# EAGLE board CT_schematic (EAGLE 7.6.0)

Size 100 x 80 mm. Coordinates in mm from the lower left corner, seen from the top.
Outline: 0,0 100,0 100,80 0,80 0,0
Copper layers (1*16): Top 0.035mm / dielectric 1.5mm / Bottom 0.035mm
Design rules "default": minimum track width 10mil, minimum drill 24mil, track to track 8mil, track to pad 8mil, pad to pad 8mil, via to via 8mil, smd to smd 8mil, copper to edge 40mil, drill to drill 8mil, minimum pad ring 10mil, minimum via ring 8mil, stop-mask expansion 4mil, vias tented up to drill 0mil, thermal gap 10mil

## Footprints (pad centres in the part's own frame; a part is rotated, then mirrored left to right if it is on the bottom)
C0603 = smd 0.8 x 0.8: 1 -0.762,0; 2 0.762,0
C0402 = smd 0.5 x 0.5: 1 -0.508,0; 2 0.508,0
C0805 = smd 1.2 x 1.3: 1 -1.016,0; 2 1.016,0
C1206 = smd 1.3 x 1.6: 1 -1.524,0; 2 1.524,0
DR1040 = smd 1.6 x 3.2: 1 -4.458,0; 2 4.458,0
R0603 = smd 0.8 x 0.8: 1 -0.762,0; 2 0.762,0
LQFP100 = smd 0.3 x 1.2: 1 -6,-7.75; 2 -5.5,-7.75; 3 -5,-7.75; 4 -4.5,-7.75; 5 -4,-7.75; 6 -3.5,-7.75; 7 -3,-7.75; 8 -2.5,-7.75; 9 -2,-7.75; 10 -1.5,-7.75; 11 -1,-7.75; 12 -0.5,-7.75; 13 0,-7.75; 14 0.5,-7.75; 15 1,-7.75; 16 1.5,-7.75; 17 2,-7.75; 18 2.5,-7.75; 19 3,-7.75; 20 3.5,-7.75; 21 4,-7.75; 22 4.5,-7.75; 23 5,-7.75; 24 5.5,-7.75; 25 6,-7.75; 51 6,7.75; 52 5.5,7.75; 53 5,7.75; 54 4.5,7.75; 55 4,7.75; 56 3.5,7.75; 57 3,7.75; 58 2.5,7.75; 59 2,7.75; 60 1.5,7.75; 61 1,7.75; 62 0.5,7.75; 63 0,7.75; 64 -0.5,7.75; 65 -1,7.75; 66 -1.5,7.75; 67 -2,7.75; 68 -2.5,7.75; 69 -3,7.75; 70 -3.5,7.75; 71 -4,7.75; 72 -4.5,7.75; 73 -5,7.75; 74 -5.5,7.75; 75 -6,7.75 | smd 1.2 x 0.3: 26 7.75,-6; 27 7.75,-5.5; 28 7.75,-5; 29 7.75,-4.5; 30 7.75,-4; 31 7.75,-3.5; 32 7.75,-3; 33 7.75,-2.5; 34 7.75,-2; 35 7.75,-1.5; 36 7.75,-1; 37 7.75,-0.5; 38 7.75,0; 39 7.75,0.5; 40 7.75,1; 41 7.75,1.5; 42 7.75,2; 43 7.75,2.5; 44 7.75,3; 45 7.75,3.5; 46 7.75,4; 47 7.75,4.5; 48 7.75,5; 49 7.75,5.5; 50 7.75,6; 76 -7.75,6; 77 -7.75,5.5; 78 -7.75,5; 79 -7.75,4.5; 80 -7.75,4; 81 -7.75,3.5; 82 -7.75,3; 83 -7.75,2.5; 84 -7.75,2; 85 -7.75,1.5; 86 -7.75,1; 87 -7.75,0.5; 88 -7.75,0; 89 -7.75,-0.5; 90 -7.75,-1; 91 -7.75,-1.5; 92 -7.75,-2; 93 -7.75,-2.5; 94 -7.75,-3; 95 -7.75,-3.5; 96 -7.75,-4; 97 -7.75,-4.5; 98 -7.75,-5; 99 -7.75,-5.5; 100 -7.75,-6
TSSOP20-I = smd 0.4 x 1.35: 1 -2.925,-2.875; 2 -2.275,-2.875; 3 -1.625,-2.875; 4 -0.975,-2.875; 5 -0.325,-2.875; 6 0.325,-2.875; 7 0.975,-2.875; 8 1.625,-2.875; 9 2.275,-2.875; 10 2.925,-2.875; 11 2.925,2.875; 12 2.275,2.875; 13 1.625,2.875; 14 0.975,2.875; 15 0.325,2.875; 16 -0.325,2.875; 17 -0.975,2.875; 18 -1.625,2.875; 19 -2.275,2.875; 20 -2.925,2.875
HTSS-105-01-G-D = drill 1 pad 1.8 square: 1 0,0 | drill 1 pad 1.8: 2 0,2.54; 3 2.54,0; 4 2.54,2.54; 5 5.08,0; 6 5.08,2.54; 7 7.62,0; 8 7.62,2.54; 9 10.16,0; 10 10.16,2.54
FCI_10118193-0001LF = smd 0.4 x 1.35: 1 -1.3,2.675; 2 -0.65,2.675; 3 0,2.675; 4 0.65,2.675; 5 1.3,2.675 | smd 1.6 x 1.4: 6 -3.2,2.45; 7 3.2,2.45 | smd 1.9 x 1.9: 8 -1.2,0; 9 1.2,0 | hole 0.5: -3.3,0; 3.3,0
SOT143B = smd 1 x 0.7: 1 -0.75,-1 | smd 0.6 x 0.7: 2 0.95,-1; 3 0.95,1; 4 -0.95,1
XB24CZ7UIS-004 = smd 2.84 x 1.52: 1 -10,6; 2 -10,4; 3 -10,2; 4 -10,0; 5 -10,-2; 6 -10,-4; 7 -10,-6; 8 -10,-8; 9 -10,-10; 10 -10,-12; 11 -10,-14; 12 -10,-16; 13 -10,-18; 21 10,-18; 22 10,-16; 23 10,-14; 24 10,-12; 25 10,-10; 26 10,-8; 27 10,-6; 28 10,-4; 29 10,-2; 30 10,0; 31 10,2; 32 10,4; 33 10,6; 34 10,8; 35 10,10; 36 10,12; 37 10,14 | smd 1.52 x 2.84: 14 -6,-19.68; 15 -4,-19.68; 16 -2,-19.68; 17 0,-19.68; 18 2,-19.68; 19 4,-19.68; 20 6,-19.68
ABS07-32.768KHZ-7-T = smd 1.1 x 2.4: 1 -2.5,0; 2 0,0
ASFL1 = smd 1.7 x 1.5: 1 -1.27,-1.1; 2 1.27,-1.1; 3 1.27,1.1; 4 -1.27,1.1
TSOT-23-5 = smd 1.3 x 0.62: 1 -1.31,0.95; 2 -1.31,0; 3 -1.31,-0.95; 4 1.31,-0.95; 5 1.31,0.95
DFN8_2X3MC = smd 0.813 x 0.305: 1 -1.398,0.75; 2 -1.398,0.25; 3 -1.398,-0.25; 4 -1.398,-0.75; 5 1.398,-0.75; 6 1.398,-0.25; 7 1.398,0.25; 8 1.398,0.75 | smd 1.753 x 1.549: 9 0,0
JST-2-SMD = smd 1 x 4.6: 1 -1,-3.7; 2 1,-3.7 | smd 1.6 x 3.4: NC1 -3.4,1.5; NC2 3.4,1.5
SON-6 = smd 0.55 x 0.3: 1 -0.355,0.5 | smd 0.52 x 0.3: 2 -0.37,0; 3 -0.37,-0.5; 4 0.37,-0.5; 5 0.37,0; 6 0.37,0.5
SW_4-1437565-2 = smd 1.4 x 2.1: 1 -2.23,4.55; 2 -2.23,-4.55; 3 2.23,4.55; 4 2.23,-4.55
LGM67K-G1J2-24-Z = smd 0.8 x 1.4: A -2,0; C 0,0
NC7SZ125M5X = smd 1.3 x 0.7: 1 -1.3,0.95; 2 -1.3,0; 3 -1.3,-0.95; 4 1.3,-0.95; 5 1.3,0.95
DUMMY_PACKAGE_131 = drill 0.3: 1 0,-1; 2 1.5,-1; 3 3,-1

## Placement (x,y rotation side)
C1  1e-07  [C0603]  -19.05,77.47 0 top  (outside the outline)
C2  1e-07  [C0603]  -22.86,77.47 0 top  (outside the outline)
C3  1e-07  [C0603]  -26.67,77.47 0 top  (outside the outline)
C4  1e-07  [C0603]  -30.48,77.47 0 top  (outside the outline)
C5  1e-07  [C0603]  -34.29,77.47 0 top  (outside the outline)
C6  4.7e-06  [C0603]  -72.39,72.39 0 top  (outside the outline)
C7  1e-07  [C0603]  -38.1,77.47 0 top  (outside the outline)
C8  1e-08  [C0603]  -41.91,77.47 0 top  (outside the outline)
C9  1e-06  [C0603]  -45.72,77.47 0 top  (outside the outline)
C10  1e-11  [C0402]  -15.24,82.55 0 top  (outside the outline)
C11  1e-11  [C0402]  -19.05,82.55 0 top  (outside the outline)
C12  1e-07  [C0402]  -22.86,82.55 0 top  (outside the outline)
C13  1e-07  [C0402]  -26.67,82.55 0 top  (outside the outline)
C14  1e-07  [C0402]  -30.48,82.55 0 top  (outside the outline)
C15  1e-07  [C0402]  -34.29,82.55 0 top  (outside the outline)
C16  1e-07  [C0402]  -38.1,82.55 0 top  (outside the outline)
C17  1e-07  [C0402]  -41.91,82.55 0 top  (outside the outline)
C18  1e-05  [C0805]  -72.39,64.77 0 top  (outside the outline)
C19  1e-07  [C0402]  -45.72,82.55 0 top  (outside the outline)
C20  4.7e-11  [C0402]  -69.85,77.47 0 top  (outside the outline)
C21  8.2e-12  [C0603]  -15.24,77.47 0 top  (outside the outline)
C22  1e-08  [C0402]  -49.53,82.55 0 top  (outside the outline)
C23  1e-05  [C0805]  -15.24,72.39 0 top  (outside the outline)
C24  1e-05  [C0805]  -20.32,72.39 0 top  (outside the outline)
C25  1e-07  [C0402]  -53.34,82.55 0 top  (outside the outline)
C26  1e-05  [C1206]  -48.26,64.77 0 top  (outside the outline)
C27  1e-05  [C1206]  -54.61,64.77 0 top  (outside the outline)
C28  1e-08  [C0402]  -57.15,82.55 0 top  (outside the outline)
C29  1e-08  [C0402]  -60.96,82.55 0 top  (outside the outline)
I1  3.8e-06  [DR1040]  -53.34,45.72 0 top  (outside the outline)
R2  1000.0  [R0603]  -49.53,77.47 0 top  (outside the outline)
R4  4700.0  [R0603]  -53.34,77.47 0 top  (outside the outline)
R5  4700.0  [R0603]  -57.15,77.47 0 top  (outside the outline)
R6  10000.0  [R0603]  -53.34,72.39 0 top  (outside the outline)
R7  220000.0  [R0603]  -38.1,72.39 0 top  (outside the outline)
R8  1000000.0  [R0603]  -33.02,72.39 0 top  (outside the outline)
R9  10000.0  [R0603]  -58.42,72.39 0 top  (outside the outline)
R10  10000.0  [R0603]  -63.5,72.39 0 top  (outside the outline)
R11  9100.0  [R0603]  -60.96,77.47 0 top  (outside the outline)
R12  680000.0  [R0603]  -43.18,72.39 0 top  (outside the outline)
R13  120000.0  [R0603]  -48.26,72.39 0 top  (outside the outline)
R14  2000.0  [R0603]  -64.77,77.47 0 top  (outside the outline)
R15  10000.0  [R0603]  -68.58,72.39 0 top  (outside the outline)
U1  STM32L162VCT6A  [LQFP100]  -50.8,8.89 0 top  (outside the outline)
U2  SP3203ECY-L/TR  [TSSOP20-I]  -43.18,45.72 0 top  (outside the outline)
U3  HTSS-105-01-G-D  [HTSS-105-01-G-D]  -27.94,55.88 0 top  (outside the outline)
U4  10118193-0001LF  [FCI_10118193-0001LF]  -53.34,55.88 0 top  (outside the outline)
U5  prtr5v0u2ax  [SOT143B]  -24.13,87.63 0 top  (outside the outline)
U6  XB24CZ7UIS-004  [XB24CZ7UIS-004]  -25.4,21.59 0 top  (outside the outline)
U7  ABS07-32.768KHZ-7-T  [ABS07-32.768KHZ-7-T]  -27.94,66.04 0 top  (outside the outline)
U8  ASFL1-25MHZ-NCS  [ASFL1]  -44.45,55.88 0 top  (outside the outline)
U9  ltc3406es5  [TSOT-23-5]  -25.4,71.12 0 top  (outside the outline)
U10  MCP73831T-2ACI/MC  [DFN8_2X3MC]  -39.37,86.36 0 top  (outside the outline)
U11  S2B-PH-SM4-TB(LF)(SN)  [JST-2-SMD]  -68.58,45.72 0 top  (outside the outline)
U12  TPS3895ADRYR  [SON-6]  -33.02,86.36 0 top  (outside the outline)
U13  4-1437565-2  [SW_4-1437565-2]  -27.94,45.72 0 top  (outside the outline)
U14  Q65110A2395  [LGM67K-G1J2-24-Z]  -36.83,66.04 0 top  (outside the outline)
U15  nc7sz125m5x  [NC7SZ125M5X]  -59.69,63.5 0 top  (outside the outline)
U16  nc7sz125m5x  [NC7SZ125M5X]  -66.04,63.5 0 top  (outside the outline)
U17  Dummy  [DUMMY_PACKAGE_131]  -30.48,87.63 0 top  (outside the outline)

## Library data of the parts
C1-C29 I1 R2 R4-R15 U1-U17 = circuit_tree

## Nets
CLK_CRYSTAL_U1_8: C10.1 U1.8 U7.1
CLK_CRYSTAL_U1_9: C11.1 U1.9 U7.2
CLK_U1_12: U1.12 U8.3
GND: C1.2 C2.2 C3.2 C4.2 C5.2 C6.2 C7.2 C8.2 C9.2 C10.2 C11.2 C12.2 C13.2 C16.2 C17.2 C18.2 C19.2 C20.2 C21.2 C22.2 C23.2 C24.1 C24.2 C25.2 C26.2 C27.2 C28.2 C29.2 R2.2 R6.2 R7.2 R11.2 R13.2 R14.2 U1.10 U1.19 U1.20 U1.27 U1.49 U1.74 U1.99 U2.18 U3.9 U4.5 U4.6 U4.7 U4.8 U4.9 U5.1 U6.1 U6.11 U6.13 U6.22 U6.35 U8.2 U9.2 U10.6 U10.9 U11.2 U12.2 U14.C U15.1 U15.3 U16.1 U16.3 U17.1
INPUT_USBPOWER_5V: C26.1 R15.2 U4.1 U5.4 U10.1 U10.2
NET_U1_6: C7.1 U1.6
NET_U1_14: R5.1 U1.14 U16.4
NET_U1_94: R6.1 U1.94
NET_U1_97: U14.A
NET_U1_98: U13.3 U13.4
NET_U2_1: C14.1 U2.1
NET_U2_2: C16.1 U2.2
NET_U2_3: C14.2 U2.3
NET_U2_4: C15.1 U2.4
NET_U2_5: C15.2 U2.5
NET_U2_6: C17.1 U2.6
NET_U2_20: U2.20
NET_U3_3: U2.14 U3.3
NET_U3_4: U2.13 U3.4
NET_U3_5: U2.17 U3.5
NET_U3_6: U2.16 U3.6
NET_U6_6: R4.1 U6.6 U15.4
NET_U9_1: U9.1
NET_U9_3: I1.1 U9.3
NET_U9_5: R7.1 R8.1 U9.5
NET_U9_ATNET_3: I1.2 R8.2
NET_U10_5: R15.1 U10.5
NET_U10_8: R14.1 U10.8
NET_U12_1: R10.1 R11.1 U12.1
NET_U12_3: R12.2 R13.1 U12.3
NET_U12_4: R9.1 U12.4 U15.2 U16.2
NET_U13_1: R2.1 U13.1 U13.2
PROC_PE2: U1.1 U17.2
PROC_PE3: U1.2 U17.3
PROC_SPI1_MISO: U1.31 U6.17
PROC_SPI1_MOSI: U1.32 U6.16
PROC_SPI1_NSS: U1.29 U6.15
PROC_SPI1_SCK: U1.30 U6.14
PROC_USART2_CTS: U1.23 U2.8
PROC_USART2_RTS: U1.24 U2.10
PROC_USART2_RX: U1.26 U2.11
PROC_USART2_TX: U1.25 U2.7
PROC_USB_DM: U1.70 U4.2 U5.3
PROC_USB_DP: U1.71 U4.3 U5.2
VCC_S1_3V7: C23.1 C27.1 U9.4 U10.3 U10.4 U11.1
VCC_TIER1_3V3: C1.1 C2.1 C3.1 C4.1 C5.1 C6.1 C8.1 C9.1 C12.1 C13.1 C18.1 C19.1 C20.1 C21.1 C22.1 C24.2 C25.1 C28.1 C29.1 I1.2 R4.2 R5.2 R8.2 R9.2 R10.2 R12.1 U1.11 U1.21 U1.22 U1.28 U1.50 U1.75 U1.100 U2.12 U2.19 U6.2 U6.27 U8.4 U12.6 U15.5 U16.5

## Tracks (layer width: path | path; a pad name or v marks a point on that pad's centre or on a via)
CLK_CRYSTAL_U1_8  (2 unrouted)
CLK_CRYSTAL_U1_9  (2 unrouted)
CLK_U1_12  (1 unrouted)
GND  (65 unrouted)
INPUT_USBPOWER_5V  (5 unrouted)
NET_U1_6  (1 unrouted)
NET_U1_14  (2 unrouted)
NET_U1_94  (1 unrouted)
NET_U1_98  (1 unrouted)
NET_U2_1  (1 unrouted)
NET_U2_2  (1 unrouted)
NET_U2_3  (1 unrouted)
NET_U2_4  (1 unrouted)
NET_U2_5  (1 unrouted)
NET_U2_6  (1 unrouted)
NET_U3_3  (1 unrouted)
NET_U3_4  (1 unrouted)
NET_U3_5  (1 unrouted)
NET_U3_6  (1 unrouted)
NET_U6_6  (2 unrouted)
NET_U9_3  (1 unrouted)
NET_U9_5  (2 unrouted)
NET_U9_ATNET_3  (1 unrouted)
NET_U10_5  (1 unrouted)
NET_U10_8  (1 unrouted)
NET_U12_1  (2 unrouted)
NET_U12_3  (2 unrouted)
NET_U12_4  (3 unrouted)
NET_U13_1  (2 unrouted)
PROC_PE2  (1 unrouted)
PROC_PE3  (1 unrouted)
PROC_SPI1_MISO  (1 unrouted)
PROC_SPI1_MOSI  (1 unrouted)
PROC_SPI1_NSS  (1 unrouted)
PROC_SPI1_SCK  (1 unrouted)
PROC_USART2_CTS  (1 unrouted)
PROC_USART2_RTS  (1 unrouted)
PROC_USART2_RX  (1 unrouted)
PROC_USART2_TX  (1 unrouted)
PROC_USB_DM  (2 unrouted)
PROC_USB_DP  (2 unrouted)
VCC_S1_3V7  (5 unrouted)
VCC_TIER1_3V3  (40 unrouted)